# Altium PCB ADAPTER_BOARD.PcbDoc
Units mm, origin at the board's own origin, x right, y up, seen from the top; angles counter-clockwise.
Board outline 33.4 x 66.8 mm, 2 copper layers (Top Layer, Bottom Layer); 4 components, 46 nets, 135 pads, 0 vias.
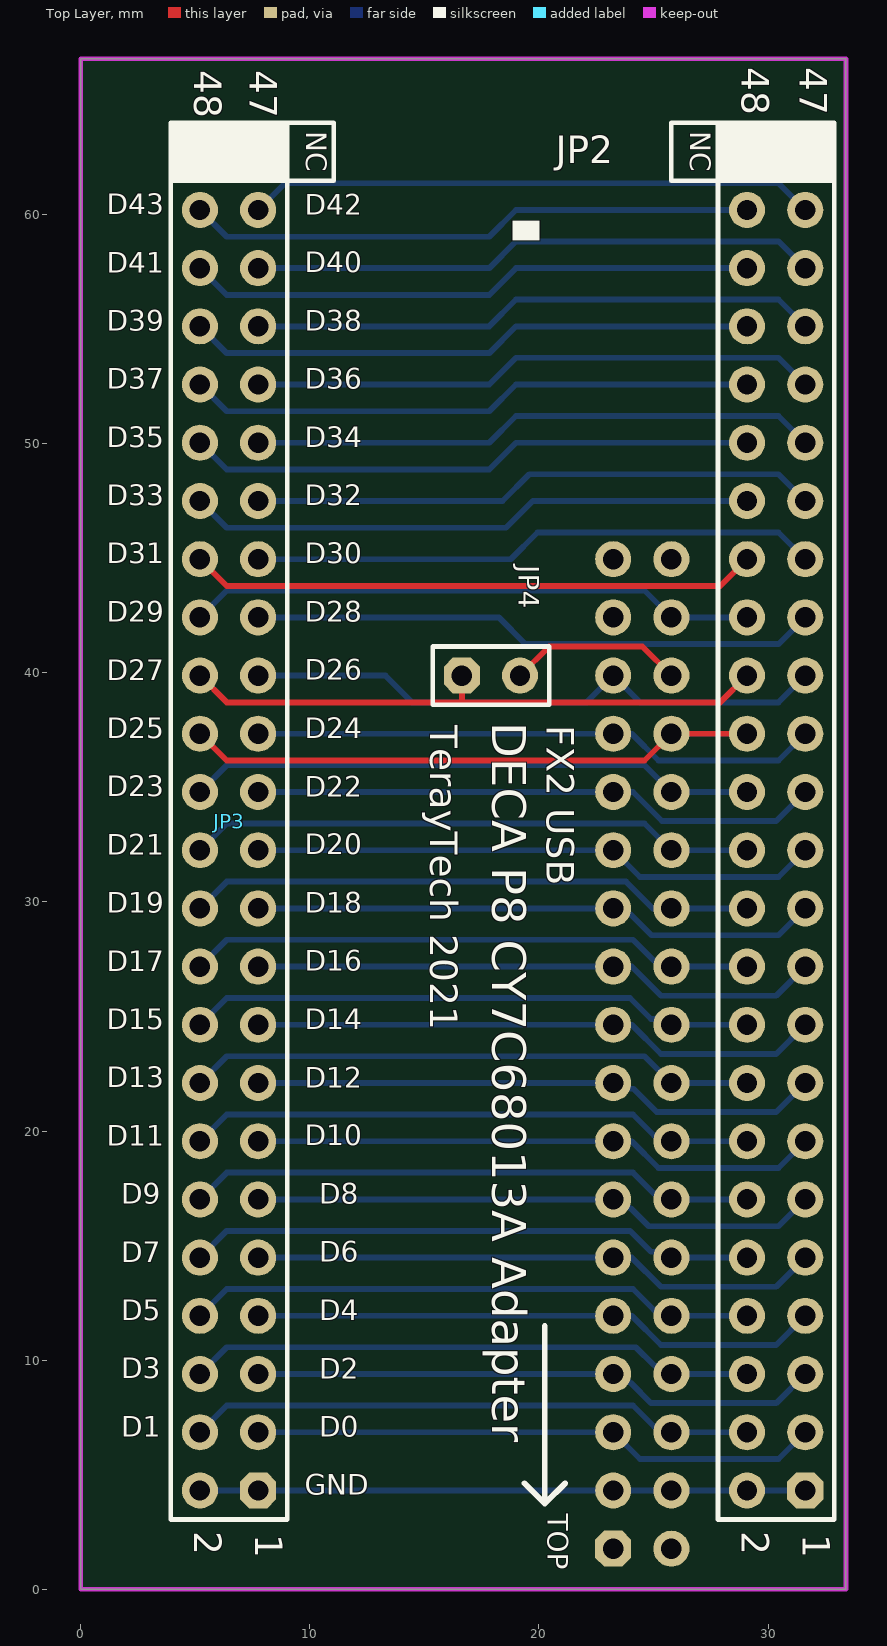
[diagram p0: Top Layer view]
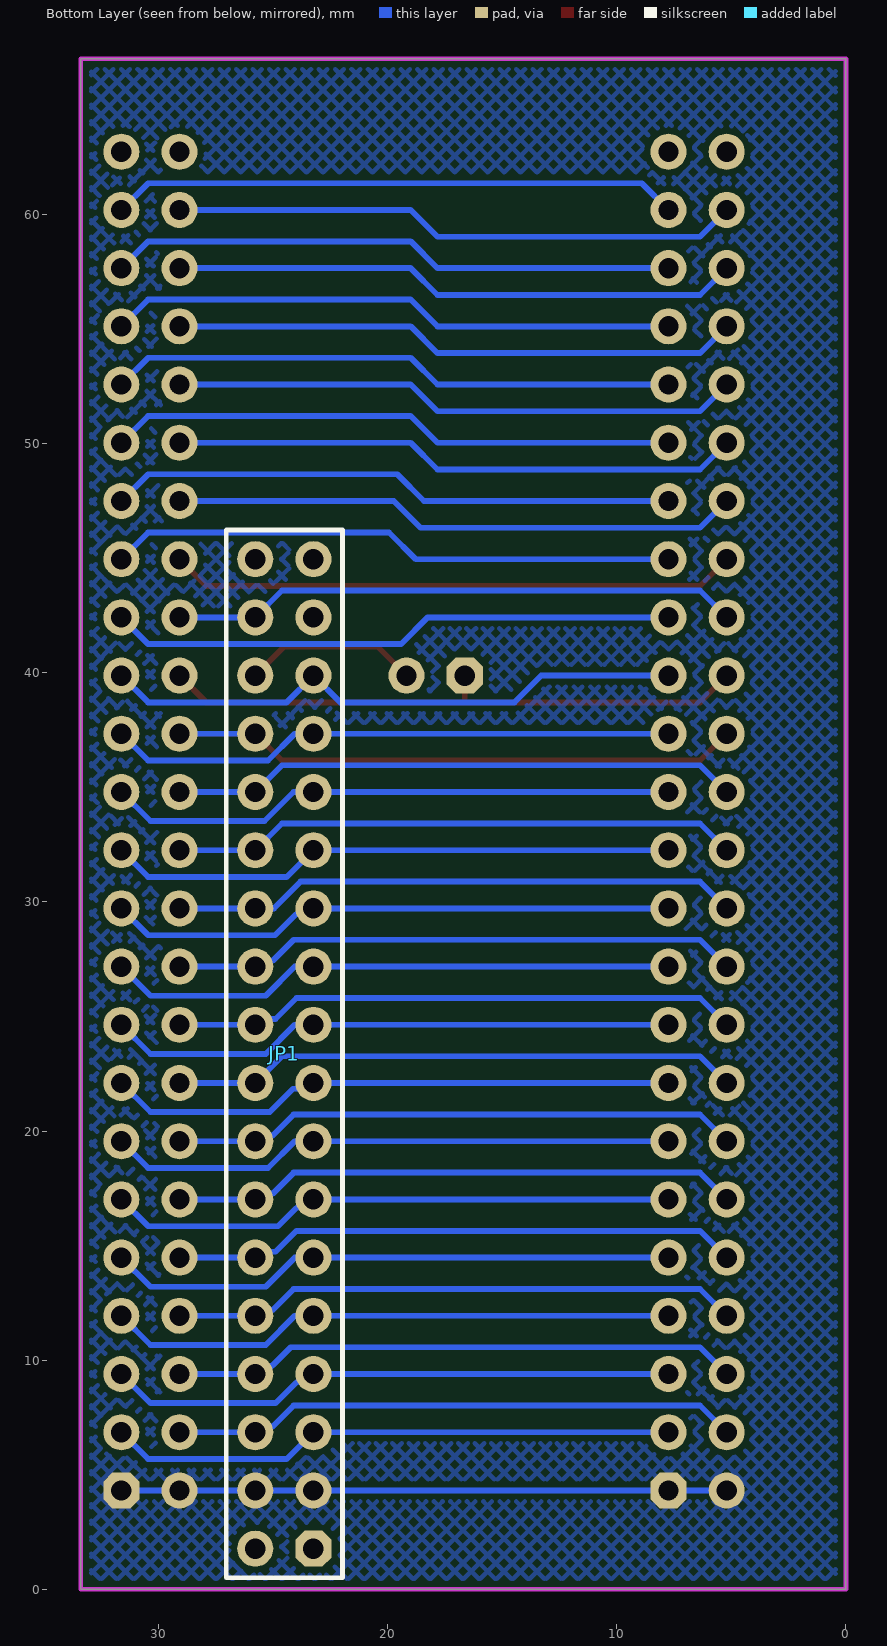
[diagram p1: Bottom Layer view, seen from below]

## Layer stack, top to bottom
Top Solder: solder mask 0.0102, Solder Resist, Dk 3.5
Top Layer: signal copper 0.0356
Dielectric 1: dielectric 0.32, FR-4, Dk 4.8
Bottom Layer: signal copper 0.0356
Bottom Solder: solder mask 0.0102, Solder Resist, Dk 3.5

## Board outline
0,0 0,66.802 33.401,66.802 33.401,0

## Design rules (kind name [scope] priority, off if disabled: settings)
Clearance [All] p1: gap=0.254 ignorepadtopadclearanceinfootprint=FALSE except(0: Arc-Hole Track-Hole SMDPad-Hole THPad-Hole Via-Hole Fill-Hole Poly-Hole Region-Hole Text-Hole)
PolygonConnect [All] p1: connectstyle=Direct reliefconductorwidth=0.254 reliefentries=4 polygonreliefangle="90 Angle" airgapwidth=0.254
RoutingVias [All] p1: holewidth=0.711 width=1.27 viastyle="Through Hole" minholewidth=0.711 minwidth=1.27 maxholewidth=0.711 maxwidth=1.27
SolderMaskExpansion [All] p1: expansion=0.102 istentingtop=FALSE
Width [All] p1: maxlimit=0.254 minlimit=0.254 preferedwidth=0.254
30 further rules are at their usual default settings.

## Components (designator, comment, footprint, x,y, rotation, side; value= is the part's Value field where it differs from the comment)
JP1 "header" header2X18 23.241,1.778 r90 bottom
JP2 "header" header2X24 31.623,4.318 r90 top
JP3 "header" header2X24 7.747,4.318 r90 top
JP4 "header" header2 16.637,39.878 r0 top

## Footprints (in the part's own frame and the unit in brackets; to place one, negate y for a bottom-side part, rotate by r counter-clockwise, add the part's x,y. Pads: shape width x height; smd on the part's side, far side on the other; paste and mask are expansions set on the pad)
header2 [mil]
  round 1 on Mech3: 0(51,1)
  oct 62x62 hole 35: 1(0,0)
  round 62 hole 35: 2(100,0)
  silkscreen extent -50,-50 150,50
header2X18 [mil]
  oct 62x62 hole 35: 1(0,0)
  round 62 hole 35: 2(0,100) 3(100,0) 4(100,100) 5(200,0) 6(200,100) 7(300,0) 8(300,100) 9(400,0) 10(400,100) 11(500,0) 12(500,100) 13(600,0) 14(600,100) 15(700,0) 16(700,100) 17(800,0) 18(800,100) 19(900,0) 20(900,100) 21(1000,0) 22(1000,100) 23(1100,0) 24(1100,100) 25(1200,0) 26(1200,100) 27(1300,0) 28(1300,100) 29(1400,0) 30(1400,100) 31(1500,0) 32(1500,100) 33(1600,0) 34(1600,100) 35(1700,0) 36(1700,100)
  silkscreen extent -50,-50 1750,150
header2X24 [mil]
  oct 62x62 hole 35: 1(0,0)
  round 62 hole 35: 2(0,100) 3(100,0) 4(100,100) 5(200,0) 6(200,100) 7(300,0) 8(300,100) 9(400,0) 10(400,100) 11(500,0) 12(500,100) 13(600,0) 14(600,100) 15(700,0) 16(700,100) 17(800,0) 18(800,100) 19(900,0) 20(900,100) 21(1000,0) 22(1000,100) 23(1100,0) 24(1100,100) 25(1200,0) 26(1200,100) 27(1300,0) 28(1300,100) 29(1400,0) 30(1400,100) 31(1500,0) 32(1500,100) 33(1600,0) 34(1600,100) 35(1700,0) 36(1700,100) 37(1800,0) 38(1800,100) 39(1900,0) 40(1900,100) 41(2000,0) 42(2000,100) 43(2100,0) 44(2100,100) 45(2200,0) 46(2200,100) 47(2300,0) 48(2300,100)
  silkscreen extent -50,-50 2350,150

## Part data
JP1: library part "HEADER 18X2"
JP2 JP3: library part "HEADER 24X2"
JP4: library part "HEADER 2"

## Nets (pads, with @x,y where several pads share a name; then routed paths per layer and width w, separated by ;. In a path a pad name is that pad's centre, name@x,y a point inside that pad or via, vN(x,y) a via of type N, cw(c..) or ccw(c..) an arc to the next point about the centre after c; other vN are vias at no path point)
ADDR0: JP1.24 JP2.22 JP3.22 | length 24.8
  Bottom Layer w0.254: JP3.22 6.375,30.886 23.8,30.886 24.968,29.718 JP1.24 JP2.22
ADDR1: JP1.23 JP2.21 JP3.21 | length 24.8
  Bottom Layer w0.254: JP3.21 JP1.23 23.494,29.465 24.002,29.465 24.917,28.55 30.455,28.55 JP2.21
CLKOUT: JP1.30 JP2.28 JP3.28 | length 28.1
  Top Layer w0.254: JP3.28 6.375,36.17 24.613,36.17 JP1.30 JP2.28
  Bottom Layer w0.254: JP1.30 JP2.28
D0: JP1.5 JP2.3 JP3.3 | length 24.8
  Bottom Layer w0.254: JP3.3 JP1.5 24.409,5.69 30.455,5.69 JP2.3
D1: JP1.6 JP2.4 JP3.4 | length 24.8
  Bottom Layer w0.254: JP3.4 6.375,8.026 24.105,8.026 25.02,7.111 25.528,7.111 JP1.6 JP2.4
D2: JP1.7 JP2.5 JP3.5 | length 24.9
  Bottom Layer w0.254: JP3.5 23.598,9.398 23.98,9.016 24.004,9.016 24.892,8.128 30.353,8.128 JP2.5
D3: JP1.8 JP2.6 JP3.6 | length 24.8
  Bottom Layer w0.254: JP3.6 6.375,10.566 24.232,10.566 25.018,9.78 25.042,9.78 25.424,9.398 JP2.6
D4: JP1.9 JP2.7 JP3.7 | length 24.9
  Bottom Layer w0.254: JP3.7 JP1.9 24.054,11.938 25.324,10.668 30.353,10.668 JP2.7
D5: JP1.10 JP2.8 JP3.8 | length 24.8
  Bottom Layer w0.254: JP3.8 6.375,13.106 24.105,13.106 25.02,12.191 25.528,12.191 JP1.10 JP2.8
D6: JP1.11 JP2.9 JP3.9 | length 24.9
  Bottom Layer w0.254: JP3.9 JP1.11 24.054,14.478 25.324,13.208 30.353,13.208 JP2.9
D7: JP1.12 JP2.10 JP3.10 | length 24.8
  Bottom Layer w0.254: JP3.10 6.375,15.646 23.978,15.646 24.893,14.731 25.528,14.731 JP1.12 JP2.10
D8: JP1.13 JP2.11 JP3.11 | length 24.8
  Bottom Layer w0.254: JP3.11 23.598,17.018 23.98,16.636 24.004,16.636 24.79,15.85 30.455,15.85 JP2.11
D9: JP1.14 JP2.12 JP3.12 | length 24.8
  Bottom Layer w0.254: JP3.12 6.375,18.186 24.105,18.186 25.02,17.271 25.528,17.271 JP1.14 JP2.12
D10: JP1.15 JP2.13 JP3.13 | length 24.8
  Bottom Layer w0.254: JP3.13 JP1.15 24.054,19.558 25.222,18.39 30.455,18.39 JP2.13
D11: JP1.16 JP2.14 JP3.14 | length 24.8
  Bottom Layer w0.254: JP3.14 6.375,20.726 24.105,20.726 25.02,19.811 25.528,19.811 JP1.16 JP2.14
D12: JP1.17 JP2.15 JP3.15 | length 24.9
  Bottom Layer w0.254: JP3.15 JP1.17 23.494,21.845 24.129,21.845 25.146,20.828 30.353,20.828 JP2.15
D13: JP1.18 JP2.16 JP3.16 | length 24.8
  Bottom Layer w0.254: JP3.16 6.375,23.266 24.613,23.266 JP1.18 JP2.16
D14: JP1.19 JP2.17 JP3.17 | length 24.9
  Bottom Layer w0.254: JP3.17 JP1.19 24.054,24.638 25.324,23.368 30.353,23.368 JP2.17
D15: JP1.20 JP2.18 JP3.18 | length 24.8
  Bottom Layer w0.254: JP3.18 6.375,25.806 23.978,25.806 24.893,24.891 25.528,24.891 JP1.20 JP2.18
D16: JP1.21 JP2.19 JP3.19 | length 24.9
  Bottom Layer w0.254: JP3.19 JP1.21 24.054,27.178 25.324,25.908 30.353,25.908 JP2.19
D17: JP1.22 JP2.20 JP3.20 | length 24.8
  Bottom Layer w0.254: JP3.20 6.375,28.346 24.105,28.346 25.02,27.431 25.528,27.431 JP1.22 JP2.20
D20: JP1.25 JP2.23 JP3.23 | length 24.8
  Bottom Layer w0.254: JP3.23 JP1.25 24.409,31.09 30.455,31.09 JP2.23
D21: JP1.26 JP2.24 JP3.24 | length 24.8
  Bottom Layer w0.254: JP3.24 6.375,33.426 24.613,33.426 JP1.26 JP2.24
D22: JP1.27 JP2.25 JP3.25 | length 24.9
  Bottom Layer w0.254: JP3.25 JP1.27 24.106,34.798 25.376,33.528 30.353,33.528 JP2.25
D23: JP1.28 JP2.26 JP3.26 | length 24.8
  Bottom Layer w0.254: JP3.26 6.375,35.966 24.613,35.966 JP1.28 JP2.26
D24: JP1.29 JP2.27 JP3.27 | length 24.8
  Bottom Layer w0.254: JP3.27 JP1.29 24.054,37.338 25.222,36.17 30.455,36.17 JP2.27
D26: JP1.31 JP2.29 JP3.29 | length 25.8
  Bottom Layer w0.254: JP3.29 13.298,39.878 14.467,38.71 22.073,38.71 JP1.31 24.409,38.71 30.455,38.71 JP2.29
D27: JP2.30 JP3.30 JP4.1 | length 26
  Top Layer w0.254: JP3.30 6.375,38.71 16.637,38.71 ; JP4.1 16.637,38.71 ; JP2.30 27.915,38.71 16.637,38.71
D28: JP2.31 JP3.31 | length 24.8
  Bottom Layer w0.254: JP3.31 18.251,42.418 19.42,41.25 30.455,41.25 JP2.31
D29: JP1.34 JP2.32 JP3.32 | length 24.8
  Bottom Layer w0.254: JP3.32 6.375,43.586 24.613,43.586 JP1.34 JP2.32
D30: JP2.33 JP3.33 | length 24.8
  Bottom Layer w0.254: JP3.33 18.771,44.958 19.939,46.126 30.455,46.126 JP2.33
D31: JP2.34 JP3.34 | length 24.8
  Top Layer w0.254: JP3.34 6.375,43.79 27.915,43.79 JP2.34
D32: JP2.35 JP3.35 | length 24.8
  Bottom Layer w0.254: JP3.35 18.415,47.498 19.583,48.666 30.455,48.666 JP2.35
D33: JP2.36 JP3.36 | length 24.8
  Bottom Layer w0.254: JP3.36 6.375,46.33 18.567,46.33 19.736,47.498 JP2.36
D34: JP2.37 JP3.37 | length 24.8
  Bottom Layer w0.254: JP3.37 17.831,50.038 18.999,51.206 30.455,51.206 JP2.37
D35: JP2.38 JP3.38 | length 24.8
  Bottom Layer w0.254: JP3.38 6.375,48.87 17.831,48.87 18.999,50.038 JP2.38
D36: JP2.39 JP3.39 | length 24.8
  Bottom Layer w0.254: JP3.39 17.831,52.578 18.999,53.746 30.455,53.746 JP2.39
D37: JP2.40 JP3.40 | length 24.8
  Bottom Layer w0.254: JP3.40 6.375,51.41 17.831,51.41 18.999,52.578 JP2.40
D38: JP2.41 JP3.41 | length 24.8
  Bottom Layer w0.254: JP3.41 17.831,55.118 18.999,56.286 30.455,56.286 JP2.41
D39: JP2.42 JP3.42 | length 24.8
  Bottom Layer w0.254: JP3.42 6.375,53.95 17.831,53.95 18.999,55.118 JP2.42
D40: JP2.43 JP3.43 | length 24.8
  Bottom Layer w0.254: JP3.43 17.831,57.658 18.999,58.826 30.455,58.826 JP2.43
D41: JP2.44 JP3.44 | length 24.8
  Bottom Layer w0.254: JP3.44 6.375,56.49 17.831,56.49 18.999,57.658 JP2.44
D42: JP2.45 JP3.45 | length 24.8
  Bottom Layer w0.254: JP3.45 8.915,61.366 30.455,61.366 JP2.45
D43: JP2.46 JP3.46 | length 24.8
  Bottom Layer w0.254: JP3.46 6.375,59.03 17.831,59.03 18.999,60.198 JP2.46
GND: JP1.3 JP1.4 JP2.1 JP2.2 JP3.1 JP3.2 | length 26.4
  Bottom Layer w0.254: JP3.2 JP3.1 JP1.3 JP1.4 JP2.2 JP2.1
IFCLK: JP1.32 JP4.2 | length 7.7
  Top Layer w0.254: JP4.2 20.447,41.148 24.511,41.148 JP1.32
pads on no net: JP1.1 JP1.2 JP1.33 JP1.35 JP1.36 JP2.47 JP2.48 JP3.47 JP3.48 JP4.0

## Polygon pours and split planes (outlines as drawn)
GND on Bottom Layer "NONET_L-01_P-001" (hatched 45Degree grid 0.508 track 0.203, remove dead copper, pour order 0): -0.127,35.56 -0.127,66.802 33.401,66.802 33.401,-0.127 -0.127,-0.127

## Keep-outs
Keep-Out Layer:
  lines w0.203: 0,0 0,66.802 33.401,66.802 33.401,0 0,0 ; 0,0 0,0

## Silkscreen, mask and mechanical layers (free items; w line width, h text height)
Top Overlay:
  rectangle: 27.813,61.468 32.893,64.008
  rectangle: 3.937,61.468 9.017,64.008
  lines w0.203: 3.937,61.468 11.049,61.468 11.049,64.008 9.017,64.008 ; 27.813,61.468 27.813,64.008 25.781,64.008 25.781,61.468 32.893,61.468
  lines w0.254: 19.367,4.635 20.256,3.746 ; 20.256,11.493 20.256,3.746 ; 21.145,4.635 20.256,3.746
  text "NC" at 9.541,63.627 h1.52 r270
  text "NC" at 26.305,63.627 h1.52 r270
  text "I" at 13.081,60.579 h30.48 r270
  text "D43" at 1.143,59.707 h1.52
  text "D42" at 9.779,59.69 h1.52
  text "D40" at 9.779,57.166 h1.52
  text "D41" at 1.143,57.15 h1.52
  text "D39" at 1.143,54.627 h1.52
  text "D38" at 9.779,54.627 h1.52
  text "D37" at 1.143,52.087 h1.52
  text "D36" at 9.779,52.087 h1.52
  text "D35" at 1.143,49.547 h1.52
  text "D34" at 9.779,49.547 h1.52
  text "D33" at 1.143,47.007 h1.52
  text "D32" at 9.779,47.007 h1.52
  text "D31" at 1.143,44.467 h1.52
  text "D30" at 9.779,44.467 h1.52
  text "D29" at 1.143,41.926 h1.52
  text "D28" at 9.779,41.926 h1.52
  text "D26" at 9.779,39.386 h1.52
  text "D27" at 1.143,39.37 h1.52
  text "DECA P8 CY7C68013A Adapter" at 17.469,37.846 h2.54 r270
  text "TerayTech 2021" at 14.86,37.719 h2.03 r270
  text "FX2 USB" at 19.96,37.719 h2.03 r270
  text "D25" at 1.143,36.846 h1.52
  text "D24" at 9.779,36.83 h1.52
  text "D23" at 1.143,34.307 h1.52
  text "D22" at 9.779,34.29 h1.52
  text "D20" at 9.779,31.766 h1.52
  text "D21" at 1.143,31.75 h1.52
  text "D19" at 1.143,29.226 h1.52
  text "D18" at 9.779,29.226 h1.52
  text "D16" at 9.779,26.686 h1.52
  text "D17" at 1.143,26.67 h1.52
  text "D15" at 1.143,24.146 h1.52
  text "D14" at 9.779,24.13 h1.52
  text "D13" at 1.143,21.607 h1.52
  text "D12" at 9.779,21.59 h1.52
  text "D10" at 9.779,19.066 h1.52
  text "D11" at 1.143,19.05 h1.52
  text "D9" at 1.778,16.526 h1.52
  text "D8" at 10.414,16.526 h1.52
  text "D6" at 10.414,13.986 h1.52
  text "D7" at 1.778,13.97 h1.52
  text "D5" at 1.778,11.446 h1.52
  text "D4" at 10.414,11.43 h1.52
  text "D3" at 1.778,8.907 h1.52
  text "D2" at 10.414,8.89 h1.52
  text "D0" at 10.414,6.366 h1.52
  text "D1" at 1.778,6.35 h1.52
  text "GND" at 9.779,3.826 h1.52
  text "TOP" at 20.082,3.302 h1.52 r270
Drill Drawing:
  text ".legend" at 1.778,67.723 h1.52

## Text inside footprints (layer, text, board x,y; h text height)
JP2: Top Overlay "2" at 28.448,2.54 h2.03 r270; Top Overlay "1" at 31.115,2.413 h2.03 r270; Top Overlay "48" at 28.448,66.421 h2.03 r270; Top Overlay "47" at 30.988,66.421 h2.03 r270
JP3: Top Overlay "2" at 4.572,2.54 h2.03 r270; Top Overlay "1" at 7.239,2.413 h2.03 r270; Top Overlay "48" at 4.572,66.294 h2.03 r270; Top Overlay "47" at 6.985,66.294 h2.03 r270